# Altium PCB LR_EVM78.PcbDoc
Units mm, origin at the board's own origin, x right, y up, seen from the top; angles counter-clockwise.
Board outline 90 x 62 mm, 2 copper layers (Top Layer, Bottom Layer), stack 1.571 mm thick; 53 components, 69 nets, 276 pads, 341 vias.
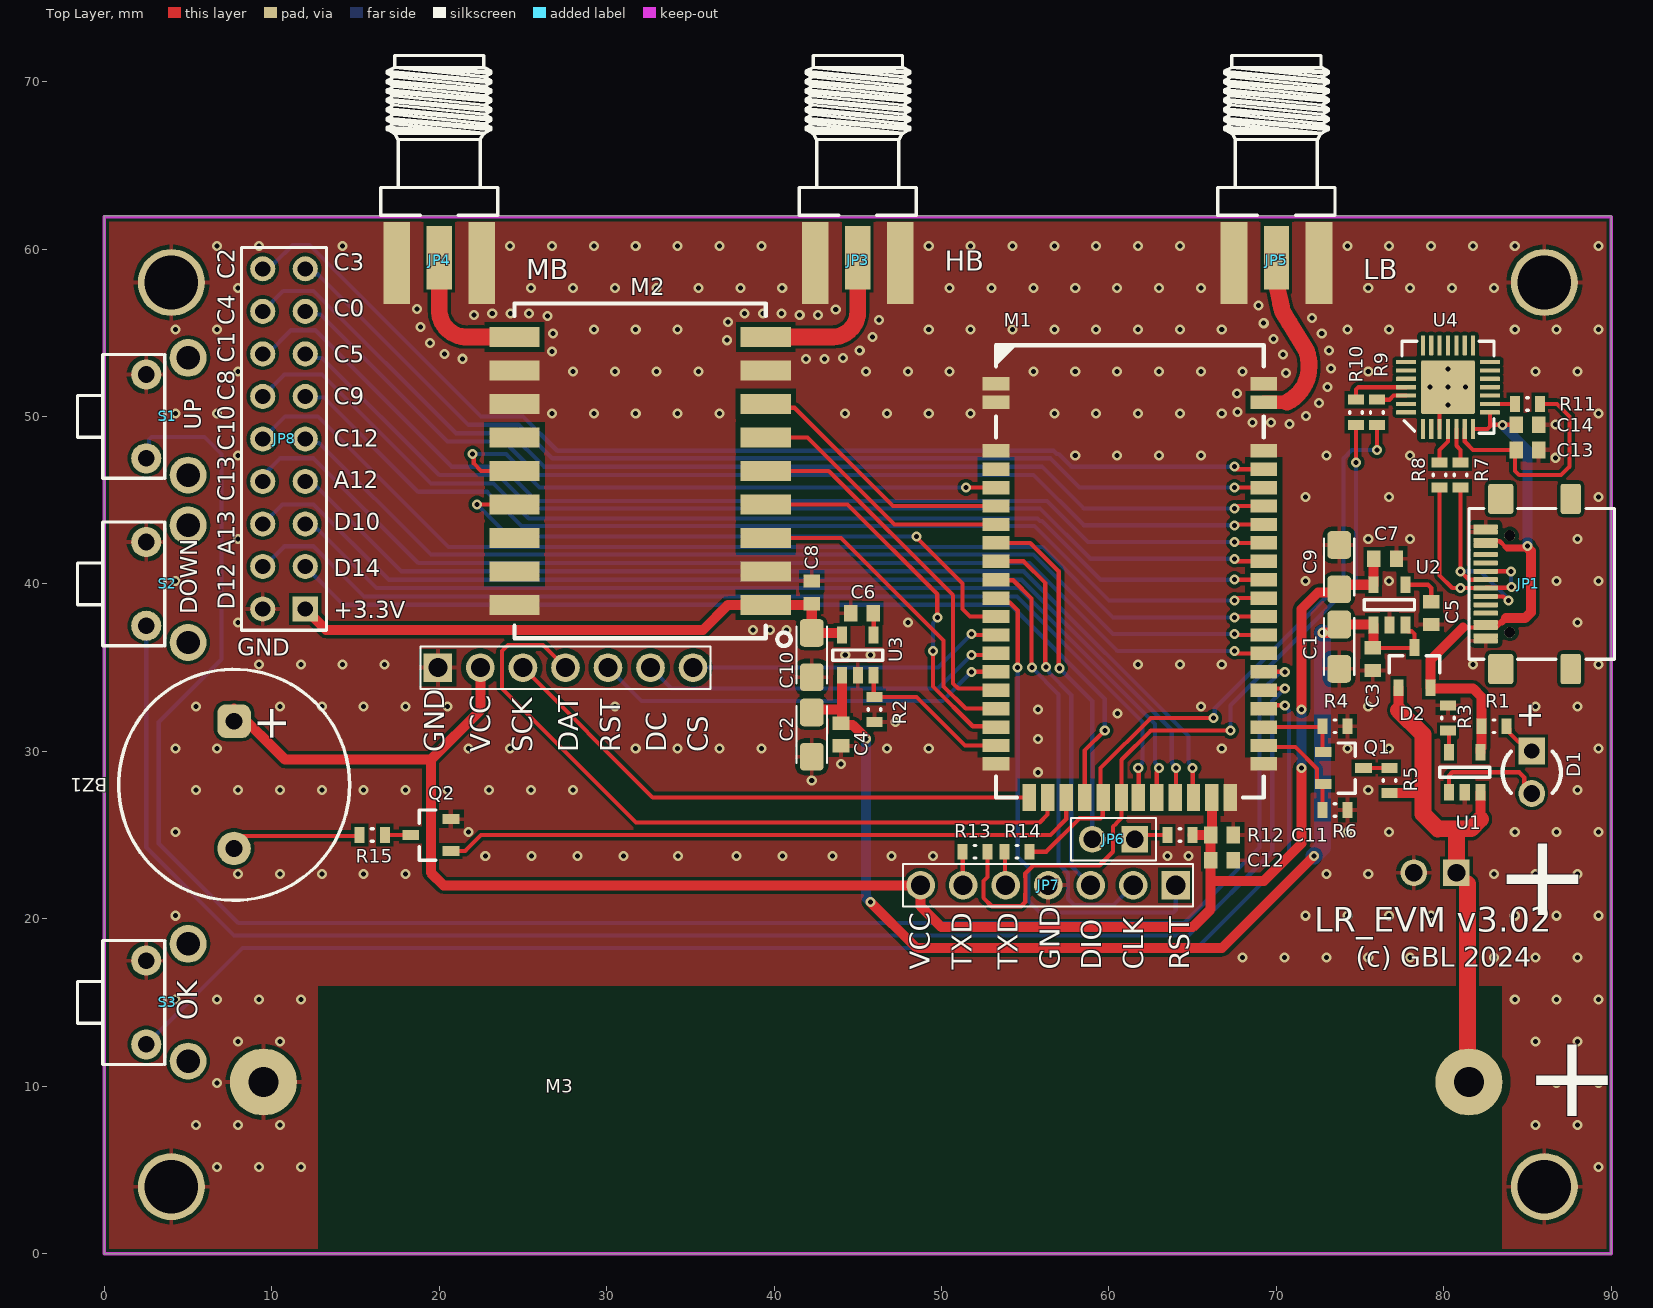
[diagram p0: Top Layer view]
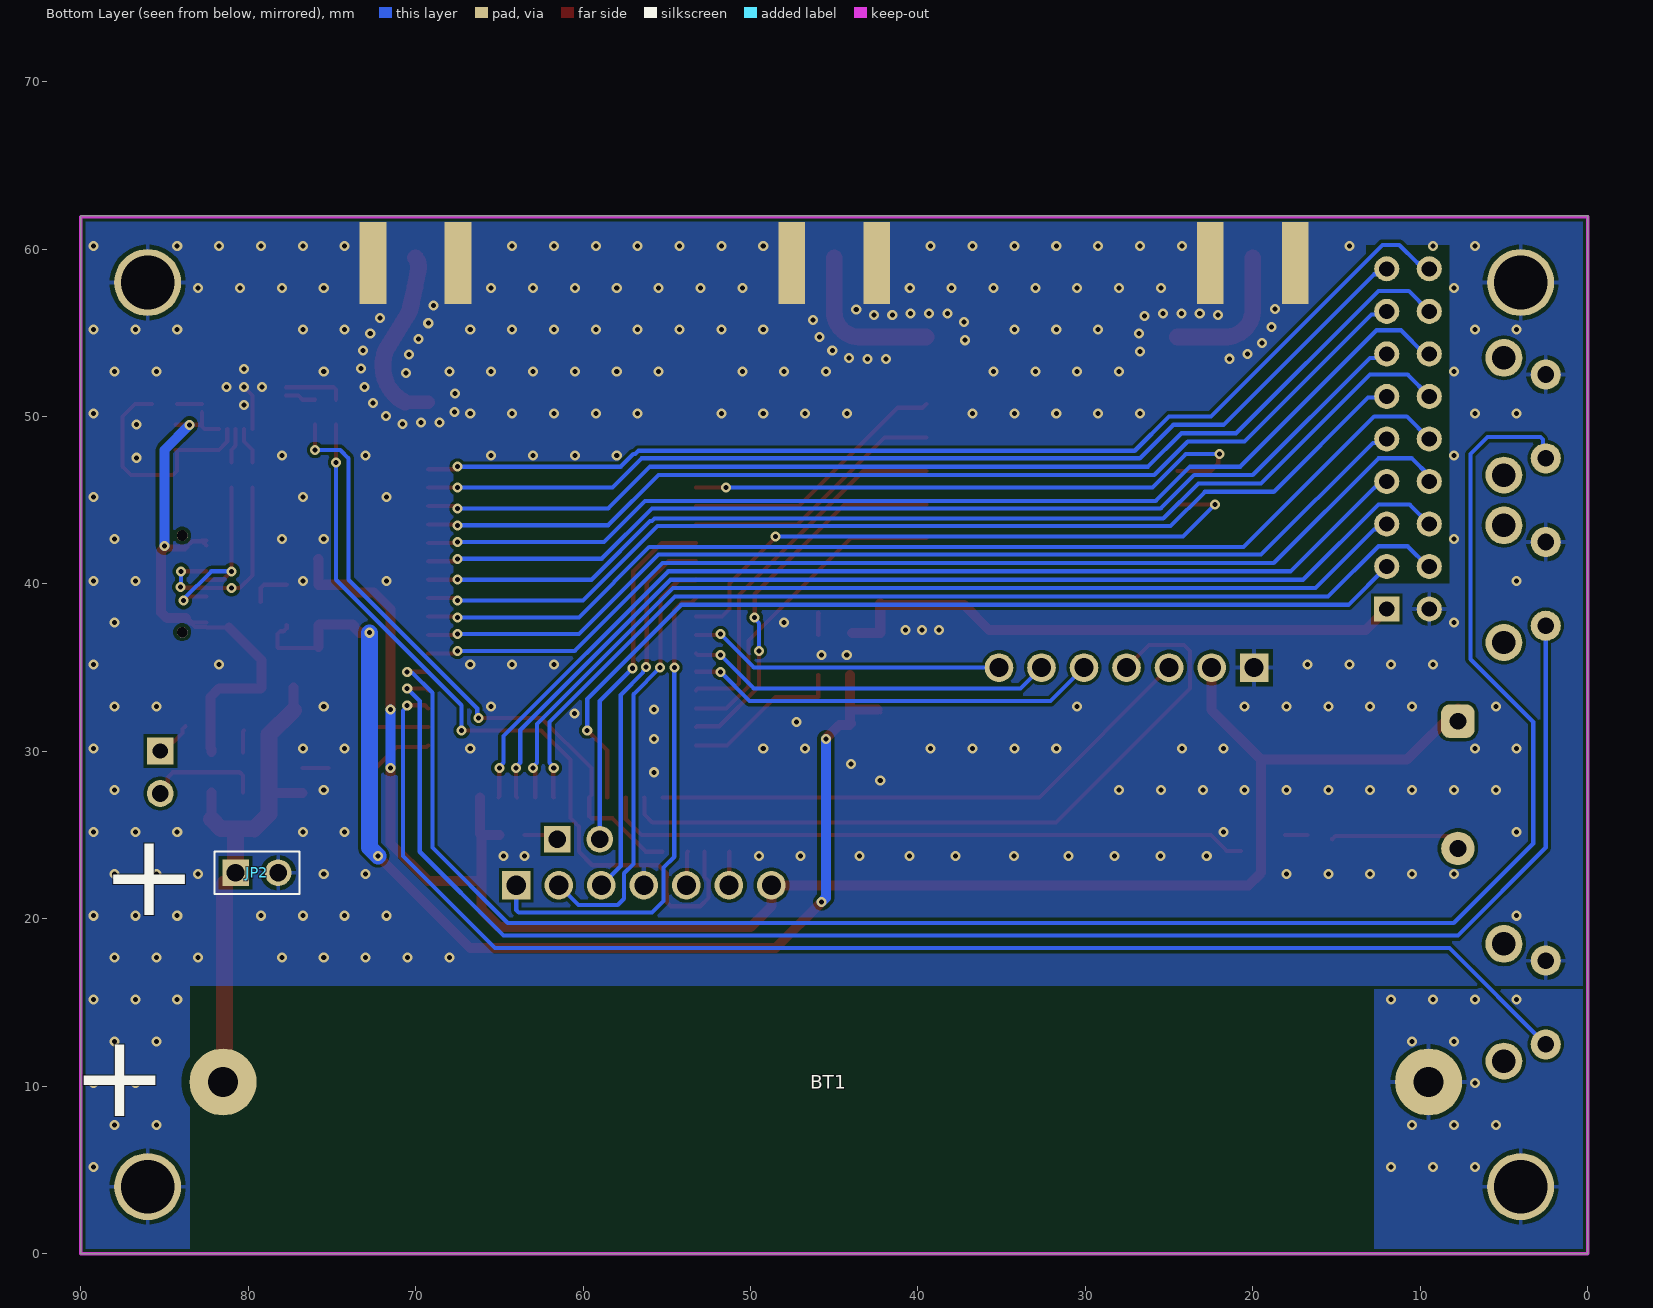
[diagram p1: Bottom Layer view, seen from below]
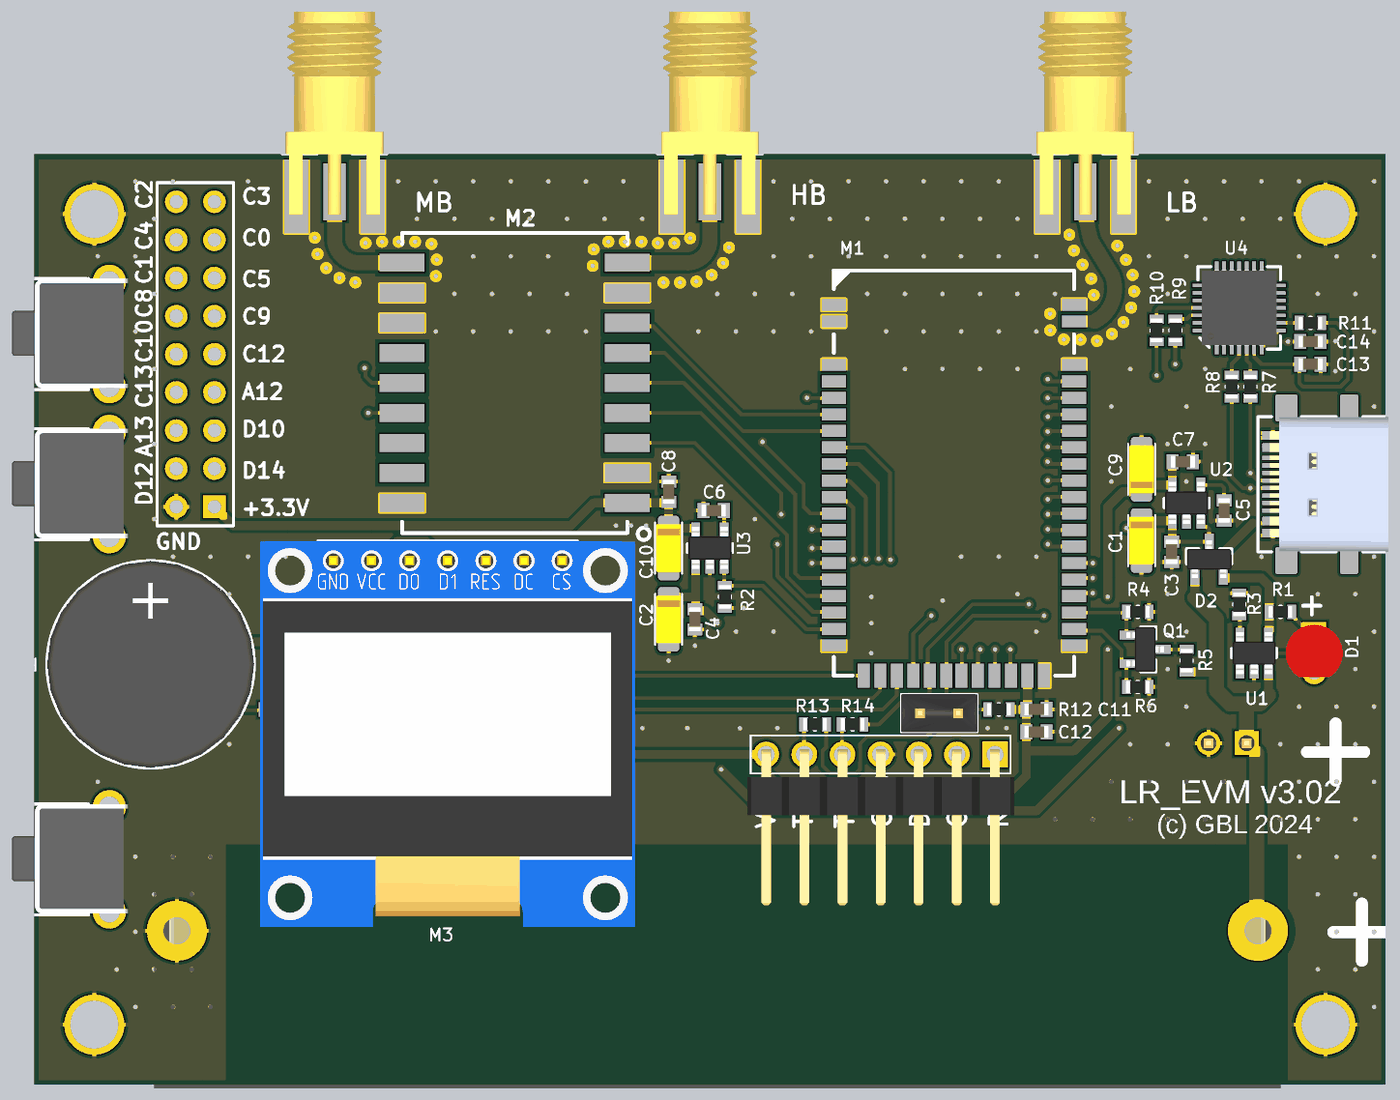
[diagram p2: 3D render of the assembled board from above, using the file's embedded part models]

## Layer stack, top to bottom
Top Solder: solder mask 0.0102, Solder Resist, Dk 3.5
Top Layer: signal copper 0.0356
Dielectric 1: dielectric 1.5, FR-4, Dk 4.8
Bottom Layer: signal copper 0.0356
Bottom Solder: solder mask 0.0102, Solder Resist, Dk 3.5

## Board outline
0,0 0,62 90,62 90,0

## Design rules (kind name [scope] priority, off if disabled: settings)
Clearance Clearance_2 [InNamedPolygon('GND_L01_P005') Or InNamedPolygon('GND_L01_P006') Or InNamedPolygon('GND_L02_P002') Or InNamedPolygon('GND_L02_P003') vs InNet('VBAT')] p1: gap=0.5 ignorepadtopadclearanceinfootprint=FALSE
Clearance Clearance_1 [InNamedPolygon('GND_L01_P001') vs InComponent('M1') or InComponent('M2') or InComponent('M3')] p2: gap=0.3 ignorepadtopadclearanceinfootprint=FALSE
Clearance [All] p3: gap=0.2 ignorepadtopadclearanceinfootprint=FALSE
HoleSize [All] p1: absolutevalues=TRUE maxlimit=5 minlimit=0.025 maxpercent=80.000 minpercent=20.000
MinimumSolderMaskSliver [All] p1: minsoldermaskwidth=0.02
PolygonConnect PolygonConnect_6 [InComponent('JP5') vs IsNamedPolygon('GND_L01_P001') Or IsNamedPolygon('GND_L02_P000')] p1: thpad.connectstyle=Relief thpad.reliefconductorwidth=0.254 thpad.reliefentries=4 thpad.polygonreliefangle="90 Angle" thpad.airgapwidth=0.254 smdpad.connectstyle=Direct smdpad.reliefconductorwidth=0.254 smdpad.reliefentries=4 smdpad.polygonreliefangle="90 Angle" smdpad.airgapwidth=0.254 via.connectstyle=Relief via.reliefconductorwidth=0.254 via.reliefentries=4 via.polygonreliefangle="90 Angle" via.airgapwidth=0.254
PolygonConnect PolygonConnect_5 [All vs IsNamedPolygon('GND_L01_P005') Or IsNamedPolygon('GND_L01_P006') Or IsNamedPolygon('GND_L02_P002') Or IsNamedPolygon('GND_L02_P003')] p2: thpad.connectstyle=Relief thpad.reliefconductorwidth=0.254 thpad.reliefentries=4 thpad.polygonreliefangle="90 Angle" thpad.airgapwidth=0.254 smdpad.connectstyle=Relief smdpad.reliefconductorwidth=0.254 smdpad.reliefentries=4 smdpad.polygonreliefangle="90 Angle" smdpad.airgapwidth=0.254 via.connectstyle=Direct via.reliefconductorwidth=0.254 via.reliefentries=4 via.polygonreliefangle="90 Angle" via.airgapwidth=0.254
PolygonConnect PolygonConnect_4 [InComponent('JP3') or InComponent('JP4') or InComponent('JP7') vs IsNamedPolygon('GND_L02_P000')] p3: thpad.connectstyle=Relief thpad.reliefconductorwidth=0.254 thpad.reliefentries=4 thpad.polygonreliefangle="90 Angle" thpad.airgapwidth=0.254 smdpad.connectstyle=Direct smdpad.reliefconductorwidth=0.254 smdpad.reliefentries=4 smdpad.polygonreliefangle="90 Angle" smdpad.airgapwidth=0.254 via.connectstyle=Relief via.reliefconductorwidth=0.254 via.reliefentries=4 via.polygonreliefangle="90 Angle" via.airgapwidth=0.254
PolygonConnect PolygonConnect_2 [InComponent('JP3') or InComponent('JP4') or InComponent('JP7') or InComponent('M1') or InComponent('M2') or InComponent('M3') vs IsNamedPolygon('GND_L01_P001')] p4: thpad.connectstyle=Relief thpad.reliefconductorwidth=0.254 thpad.reliefentries=4 thpad.polygonreliefangle="90 Angle" thpad.airgapwidth=0.254 smdpad.connectstyle=Direct smdpad.reliefconductorwidth=0.254 smdpad.reliefentries=4 smdpad.polygonreliefangle="90 Angle" smdpad.airgapwidth=0.254 via.connectstyle=Relief via.reliefconductorwidth=0.254 via.reliefentries=4 via.polygonreliefangle="90 Angle" via.airgapwidth=0.254
PolygonConnect PolygonConnect_3 [InComponent('C17')or InComponent('C18') or InComponent('C20') or InComponent('C19') vs IsNamedPolygon('GND_L01_P001')] p5: thpad.connectstyle=Relief thpad.reliefconductorwidth=0.254 thpad.reliefentries=4 thpad.polygonreliefangle="90 Angle" thpad.airgapwidth=0.254 smdpad.connectstyle=Direct smdpad.reliefconductorwidth=0.254 smdpad.reliefentries=4 smdpad.polygonreliefangle="90 Angle" smdpad.airgapwidth=0.254 via.connectstyle=Relief via.reliefconductorwidth=0.254 via.reliefentries=4 via.polygonreliefangle="90 Angle" via.airgapwidth=0.254
PolygonConnect PolygonConnect_1 [All vs IsNamedPolygon('GND_L01_P001') Or IsNamedPolygon('GND_L02_P000')] p6: thpad.connectstyle=Relief thpad.reliefconductorwidth=0.254 thpad.reliefentries=4 thpad.polygonreliefangle="90 Angle" thpad.airgapwidth=0.254 smdpad.connectstyle=Relief smdpad.reliefconductorwidth=0.254 smdpad.reliefentries=4 smdpad.polygonreliefangle="90 Angle" smdpad.airgapwidth=0.254 via.connectstyle=Direct via.reliefconductorwidth=0.254 via.reliefentries=4 via.polygonreliefangle="90 Angle" via.airgapwidth=0.254
PolygonConnect [All] p7: connectstyle=Relief reliefconductorwidth=0.254 reliefentries=4 polygonreliefangle="90 Angle" airgapwidth=0.254
RoutingVias [All] p1: holewidth=0.711 width=1.27 viastyle="Through Hole" minholewidth=0.711 minwidth=1.27 maxholewidth=0.711 maxwidth=1.27
SilkToSilkClearance [All] p1: silktosilkclearance=0.05
SilkToSolderMaskClearance [IsPad] p1: minsilkscreentomaskgap=0.02 clearancetoexposedcopper=TRUE
SolderMaskExpansion [All] p1: expansion=0.102 istentingtop=FALSE
Width [All] p1: maxlimit=3 minlimit=0.15 preferedwidth=0.25
26 further rules are at their usual default settings.

## Components (designator, comment, footprint, x,y, rotation, side; value= is the part's Value field where it differs from the comment)
BT1 "18650" 18650 45.5,10.25 r180 bottom
BZ1 "AZ-14M40" AZ-14M40 7.75,28 r270 top value={Value}
C1 "22u" C_TANTAL_A 73.75,36.25 r270 top
C2 "22u" C_TANTAL_A 42.25,31 r270 top
C3 "100n" C-0603 75.75,35.5 r270 top
C4 "100n" C-0603 44,31 r270 top
C5 "nc" C-0603 79.25,38.25 r270 top
C6 "nc" C-0603 45.25,38.25 r180 top
C7 "100n" C-0603 76.5,41.5 r0 top
C8 "100n" C-0603 42.25,39.5 r90 top
C9 "22u" C_TANTAL_A 73.75,41 r90 top
C10 "22u" C_TANTAL_A 42.25,35.75 r270 top
C11 "1u" C-0603 66.75,25 r0 top
C12 "1n" C-0603 66.75,23.5 r0 top
C13 "100n" C-0603 85,48 r0 top
C14 "100n" C-0603 85,49.5 r180 top
D1 "DLED" LED_3mm_RED 85.25,28.75 r270 top
D2 "BAT54C" SOT-23 78.25,35 r90 top
JP1 "L-KLS1-5473" L-KLS1-5473 82.5,40 r90 top
JP2 "HEADER 2" PLS1-2 80.75,22.75 r180 bottom
JP3 "EM-SA071-GGT" SMA_F_EDGE 45,60.75 r270 top locked
JP4 "EM-SA071-GGT" SMA_F_EDGE 20,60.75 r270 top
JP5 "EM-SA071-GGT" SMA_F_EDGE 70,60.75 r270 top
JP6 "HEADER 2" PLS1-2 61.54,24.75 r180 top
JP7 "Header 7" PLS1-7R 63.99,22 r180 top
JP8 "Header 9X2" HDR2X9 12,38.5 r90 top locked
M1 "E78-400M22S1C" E78_400_M22S1C 61.25,40.25 r0 top locked
M2 "LORA1121" LORA1121 32,46.75 r180 top locked
M3 "OLED0_96" OLED096 19.92,35 r0 top
Q1 "MOSF-N" SOT-23 74,29 r0 top
Q2 "MMUN2211" SOT-23 19.5,25 r180 top
R1 "RES" R-0603 83,31.5 r0 top
R2 "100k" R-0603 46,32.5 r90 top
R3 "2k" R-0603 80.25,32 r270 top
R4 "1M" R-0603 73.5,31.5 r0 top
R5 "100k" R-0603 76.75,28.25 r90 top
R6 "10k" R-0603 73.5,26.5 r0 top
R7 "22" R-0603 81,46.5 r270 top
R8 "22" R-0603 79.75,46.5 r270 top
R9 "1k" R-0603 76,50.25 r90 top
R10 "1k" R-0603 74.75,50.25 r90 top
R11 "10k" R-0603 85,50.75 r180 top
R12 "1k" R-0603 64.25,25 r180 top
R13 "1k" R-0603 52,24 r0 top
R14 "1k" R-0603 54.5,24 r0 top
R15 "RES" R-0603 16,25 r0 top
S1 "KLS7-TS3602 -3 15-180" KLS7-TS3602 2.5,50 r270 top locked
S2 "KLS7-TS3602 -3 15-180" KLS7-TS3602 2.5,40 r270 top locked
S3 "KLS7-TS3602 -3 15-180" KLS7-TS3602 2.5,15 r270 top locked
U1 "MCP73831-2ATI/OT" SOT-23-5 81.25,28.75 r90 top
U2 "NCP551SN33LT1G" SOT-23-5 76.75,38.75 r90 top
U3 "NCP551SN33LT1G" SOT-23-5 45,35.75 r90 top
U4 "CP2102" QFN28 80.25,51.75 r90 top value={Value}

## Footprints (in the part's own frame and the unit in brackets; to place one, negate y for a bottom-side part, rotate by r counter-clockwise, add the part's x,y. Pads: shape width x height; smd on the part's side, far side on the other; paste and mask are expansions set on the pad)
18650 [mm]
  round 4 hole 1.8: 1(-36,0) 2(36,0)
  body extent -37.5,-10.5 37.5,10.5, height 21
AZ-14M40 [mm]
  rrect50% 2x2 hole 1: 1(-3.8,0)
  round 2 hole 1: 2(3.8,0)
  silkscreen extent -6.9,-6.9 6.9,6.9, body extent -6.89,-6.9 6.89,6.9, height 5.8
C-0603 [mm] "Chip Capacitor, 2-Leads, Body 1,60x0,80mm, IPC Medium Density"
  rect 0.8x1 smd: 1(-0.675,0) 2(0.675,0)
  body extent -0.8,-0.4 0.8,0.4, height 0.8
C_TANTAL_A [mm] "Capacitor, Polarized, Molded Body; 3.20 mm L X 1.65 mm W X 1.80 mm H body"
  rrect35% 1.66x1.42 smd: 1(1.325,0) 2(-1.325,0)
  silkscreen extent -1.7,-0.9 1.7,0.9, body extent -1.6,-0.82 1.6,0.82, height 1.8
E78_400_M22S1C [mm]
  rect 1.6x0.8 smd: 1(-8,11.7) 2(-8,10.6) 3(-8,7.7) 4(-8,6.6) 5(-8,5.5) 6(-8,4.4) 7(-8,3.3) 8(-8,2.2) 9(-8,1.1) 10(-8,0) 11(-8,-1.1) 12(-8,-2.2) 13(-8,-3.3) 14(-8,-4.4) 15(-8,-5.5) 16(-8,-6.6) 17(-8,-7.7) 18(-8,-8.8) 19(-8,-9.9) 20(-8,-11) 33(8,-11) 34(8,-9.9) 35(8,-8.8) 36(8,-7.7) 37(8,-6.6) 38(8,-5.5) 39(8,-4.4) 40(8,-3.3) 41(8,-2.2) 42(8,-1.1) 43(8,0) 44(8,1.1) 45(8,2.2) 46(8,3.3) 47(8,4.4) 48(8,5.5) 49(8,6.6) 50(8,7.7) 51(8,10.6) 52(8,11.7)
  rect 0.8x1.6 smd: 21(-6,-13) 22(-4.9,-13) 23(-3.8,-13) 24(-2.7,-13) 25(-1.6,-13) 26(-0.5,-13) 27(0.5,-13) 28(1.6,-13) 29(2.7,-13) 30(3.8,-13) 31(4.9,-13) 32(6,-13)
  silkscreen extent -8,-13 8,14, body extent -8,-13 8,13, height 2.8
HDR2X9 [mm] "Connector; Header; 9x2 Position"
  rect 1.5x1.5 hole 0.9: 1(0,0)
  round 1.5 hole 0.9: 2(0,2.54) 3(2.54,0) 4(2.54,2.54) 5(5.08,0) 6(5.08,2.54) 7(7.62,0) 8(7.62,2.54) 9(10.16,0) 10(10.16,2.54) 11(12.7,0) 12(12.7,2.54) 13(15.24,0) 14(15.24,2.54) 15(17.78,0) 16(17.78,2.54) 17(20.32,0) 18(20.32,2.54)
  silkscreen extent -1.27,-1.27 21.59,3.81
KLS7-TS3602 [mm] "miniature switch"
  round 1.8 hole 1: 1(-2.5,0) 2(2.5,0)
  oval 2.25x2.2 hole 1.4: 3(-3.5,2.5)
  round 2.2 hole 1.4: 3(3.5,2.5)
  silkscreen extent -3.7,-4.1 3.7,1.1, body extent -3.7,-3.97 3.6,3.75, height 4.4
L-KLS1-5473 [mm] "USB 3.1 Type C"
  rrect20% 1.8x1.2 smd mask+0.07: 1(-5.08,-5.08) 1(5.08,-5.08)
  rrect20% 1.8x1.5 smd mask+0.07: 1(-5.08,-0.9) 1(5.08,-0.9)
  rrect30% 0.3x1.45 smd paste-2 mask+0.07: A1(-3.1,0) A4(-2.6,0) A9(2.6,0) A12(3.4,0) B1(3.1,0) B4(2.3,0) B9(-2.3,0) B12(-3.4,0)
  rrect30% 0.3x1.45 smd mask+0.07: A5(-1.25,0) A6(-0.25,0) A7(0.25,0) A8(1.25,0) B5(1.75,0) B6(0.75,0) B7(-0.75,0) B8(-1.75,0)
  round 0.65 hole 0.65 unplated paste-2539.97 mask+0.07: MH(-2.885,-1.44) MH(2.885,-1.44)
  silkscreen extent -4.5,-7.69 4.5,1, body extent -4.47,-7.7 4.47,0.2, height 3.2
LED_3mm_RED [mm]
  rect 1.6x1.6 hole 0.9: 1(-1.27,0)
  round 1.6 hole 1: 2(1.27,0)
  silkscreen extent -1.24,-1.75 1.24,1.75, body extent -1.9,-1.9 1.6,1.9, height 5.75
LORA1121 [mm]
  rect 3x1.2 smd: 1(-7.5,8) 2(-7.5,6) 3(-7.5,4) 4(-7.5,2) 5(-7.5,0) 6(-7.5,-2) 7(-7.5,-4) 8(-7.5,-6) 9(-7.5,-8) 10(7.5,-8) 11(7.5,-6) 12(7.5,-4) 13(7.5,-2) 14(7.5,0) 15(7.5,2) 16(7.5,4) 17(7.5,6) 18(7.5,8)
  silkscreen extent -8.99,-10 7.5,10.46, body extent -7.5,-10 7.5,10, height 2
OLED096 [mm] "Header, Vertical, 2.54 mm pitch; 0.70 mm lead width, 7 pins, 1 row, 7 pins per row, 16.51 mm L X 2.54 mm W X 7.54 mm H body"
  rect 1.71x1.71 hole 1.14 paste-2539.97: 1(0,0)
  round 1.71 hole 1.14 paste-2539.97: 2(2.54,0) 3(5.08,0) 4(7.62,0) 5(10.16,0) 6(12.7,0) 7(15.24,0)
  silkscreen extent -1.04,-1.27 16.28,1.27, body extent -4.88,-24.5 20.12,1.2, height 6.54
PLS1-2 [mm] "Header, Vertical, 2.54 mm pitch; 0.64 mm lead width, 2 pins, 1 row, 2 pins per row, 5.08 mm L X 2.54 mm W X 8.54 mm H body"
  rect 1.59x1.59 hole 1.06 paste-2539.97: 1(0,0)
  round 1.59 hole 1.06 paste-2539.97: 2(2.54,0)
  silkscreen extent -1.27,-1.27 3.81,1.27, body extent -1.27,-1.27 3.81,1.27, height 8.54
PLS1-7R [mm] "Header, Vertical, 2.54 mm pitch; 0.70 mm lead width, 7 pins, 1 row, 7 pins per row, 16.51 mm L X 2.54 mm W X 7.54 mm H body"
  rect 1.71x1.71 hole 1.14 paste-2539.97: 1(0,0)
  round 1.71 hole 1.14 paste-2539.97: 2(2.54,0) 3(5.08,0) 4(7.62,0) 5(10.16,0) 6(12.7,0) 7(15.24,0)
  silkscreen extent -1.04,-1.27 16.28,1.27, body extent -1.27,-0.32 16.51,10.04, height 2.54
QFN28 [mm]
  rrect20% 1.2x0.25 smd: 1(-2.5,1.5) 2(-2.5,1) 3(-2.5,0.5) 4(-2.5,0) 5(-2.5,-0.5) 6(-2.5,-1) 7(-2.5,-1.5) 15(2.5,-1.5) 16(2.5,-1) 17(2.5,-0.5) 18(2.5,0) 19(2.5,0.5) 20(2.5,1) 21(2.5,1.5)
  rrect20% 0.25x1.2 smd: 8(-1.5,-2.5) 9(-1,-2.5) 10(-0.5,-2.5) 11(0,-2.5) 12(0.5,-2.5) 13(1,-2.5) 14(1.5,-2.5) 22(1.5,2.5) 23(1,2.5) 24(0.5,2.5) 25(0,2.5) 26(-0.5,2.5) 27(-1,2.5) 28(-1.5,2.5)
  rrect5% 3.2x3.2 smd paste-4: 29(0,0)
  silkscreen extent -2.75,-2.75 2.75,2.75, body extent -2.5,-2.5 2.5,2.5, height 1
R-0603 [mm] "Chip Resistor, 2-Leads, Body 1,60x0,82mm, IPC Medium Density"
  rect 0.6x0.95 smd: 1(-0.75,0) 2(0.75,0)
  silkscreen extent -0.05,-0.38 0.05,0.38, body extent -0.8,-0.4 0.8,0.4, height 0.45
SMA_F_EDGE [mm] "SMA End Launch Jack for 1.58mm PCB, 50 Ohm, Flat Tab Contact"
  rect 3.81x1.5 smd: 1(1.27,0)
  rect 4.9x1.6 smd: 2(1.575,2.54) 2(1.575,-2.54)
  rect 4.9x1.6 smd far side: 2(1.575,2.54) 2(1.575,-2.54)
  silkscreen extent -10.81,-3.5 -1.28,3.5, body extent -10.73,-3.25 2.77,3.25, height 3.7
SOT-23 [mm]
  rect 1x0.6 smd: 1(-1.2,0.95) 2(-1.2,-0.95) 3(1.2,0)
  silkscreen extent -0.3,-1.5 0.7,1.5, body extent -1.25,-1.5 1.25,1.5, height 1.2
SOT-23-5 [mm] "SOT23, 5-Leads, Body 2,90x2,45mm, Pitch 0,95mm, IPC Medium Density"
  rect 1x0.6 smd: 1(-1.2,0.95) 2(-1.2,0) 3(-1.2,-0.95) 4(1.2,-0.95) 5(1.2,0.95)
  silkscreen extent -0.3,-1.5 0.3,1.5, body extent -1.4,-1.45 1.4,1.45, height 1.55

## Part data
BT1: library part Battery, "Multicell Battery", LatestRevisionDate=17-Jul-2002, LatestRevisionNote="Re-released for DXP Platform.", PackageDescription="Battery; 2 Leads", PackageReference=BAT-2, Published=24-Mar-1999, Publisher="Altium Limited"
BZ1: library part BUZ-AZ-14M40, Mounting  Method=THT
C1 C2 C9 C10: library part CAPP, Voltage=16V, Вид=Конденсатор
C3 C4 C5 C6 C7 C8 C11 C12 C13 C14: library part CAPN, Voltage=50V, Вид=Конденсатор, Точність/група=NP0
JP3 JP4 JP5: library part SMA, "SMA Female R/A PCB Mount", Вид=Роз'єм
JP7: "Header, 7-Pin", LatestRevisionDate=17-Jul-2002, LatestRevisionNote="Re-released for DXP Platform.", Publisher="Altium Limited"
JP8: "Header, 9-Pin, Dual row", LatestRevisionDate=17-Jul-2002, LatestRevisionNote="Re-released for DXP Platform.", Publisher="Altium Limited"
R2 R3 R4 R5 R6 R7 R8 R9 R10 R11 R12 R13 R14: library part RES, Вид=Резистор, Точність/група=5%
S1 S2 S3: library part SW-1, Вид=Кнопка
U1: library part MCP73831
U2 U3: library part LP2980, "50mA Low-Dropout Regulator", Вид=Мікросхема
D1: Вид=Світлодіод
D2: Вид=Діод
JP1 U4: Mounting  Method=SMD
JP2 JP6: Вид=Роз'єм
Q1 Q2: Вид=Транзистор
R1 R15: Вид=Резистор, Точність/група=5%

## Free pads (board coordinates)
  round 4 hole 3.2: 0(4,4) 0(4,58) 0(86,4) 0(86,58)

## Via types
v1: diameter 0.6, hole 0.3, Top Layer to Bottom Layer, tented both sides, 293 vias
v2: diameter 0.6, hole 0.3, Top Layer to Bottom Layer, 48 vias

## Nets (pads, with @x,y where several pads share a name; then routed paths per layer and width w, separated by ;. In a path a pad name is that pad's centre, name@x,y a point inside that pad or via, vN(x,y) a via of type N, cw(c..) or ccw(c..) an arc to the next point about the centre after c; other vN are vias at no path point)
\: M1.36 S3.2 | length 83.3
  Top Layer w0.25: M1.36 69.45,32.75 v1(70.5,32.75)
  Bottom Layer w0.25: S3.2 8.25,18.25 65.25,18.25 70.75,23.75 70.75,32.429 70.5,32.679 v1(70.5,32.75)
BATT_LEVEL: M1.34 Q1.2 R6.1 | length 6.5
  Top Layer w0.25: M1.34 69.35,30.25 71.134,30.25 72.425,28.959 72.425,28.225 72.6,28.05 Q1.2 72.75,28 R6.1
BATT_MEAS: M1.35 Q1.1 R4.1 | length 5.1
  Top Layer w0.25: M1.35 72.7,31.45 R4.1 72.75,30 Q1.1
BOOT: JP6.2 M1.8 | length 21.3
  Top Layer w0.25: M1.8 55.3,42.45 57,40.75 57,35 v1(57.038,34.962)
  Bottom Layer w0.25: v1(57.038,34.962) 59,33 JP6.2
BUSY1121: M1.6 M2.7 | length 16.3
  Top Layer w0.25: M2.7 39.729,50.521 41.229,50.521 47.1,44.65 M1.6
BUZZ: M1.23 Q2.1 | length 38.8
  Top Layer w0.25: Q2.1 21.55,24.05 22.5,25 56.5,25 57.45,25.95 M1.23
DM: JP1.A7 JP1.B7 R7.2 | length 11.8
  Top Layer w0.25: R7.2 v1(81,40.75) 81.5,40.25 JP1.A7 ; JP1.B7 83.551,39.25 83.805,38.997 v1(83.86,38.997)
  Bottom Layer w0.25: v1(81,40.75) 82.2,40.75 83.86,39.09 v1(83.86,38.997)
DOWN: M1.37 S2.2 | length 96.1
  Top Layer w0.25: M1.37 69.35,33.75 v1(70.5,33.75)
  Bottom Layer w0.25: S2.2 2.5,24.25 7.75,19 64.75,19 69.75,24 69.75,33 v1(70.5,33.75)
DP: JP1.A6 JP1.B6 R8.2 | length 12.3
  Top Layer w0.25: R8.2 79.75,40.5 80.5,39.75 v1(81,39.75) JP1.A6 82.523,39.773 83.993,39.773 v1(84.03,39.811) ; JP1.B6 v1(84,40.75)
  Bottom Layer w0.25: v1(84,40.75) 84.015,40.735 84.015,39.826 v1(84.03,39.811)
EXTRF: M1.19 R2.2 U3.3 | length 9.8
  Top Layer w0.25: R2.2@45.95,33.25 U3.3 ; R2.2 48.5,33.25 51.4,30.35 M1.19
GND: BT1.2 C1.1 C2.1 C3.2 C4.2 C5.2 C6.2 C7.2 C8.2 C9.1 C10.1 C11.2 C12.2 C13.2 C14.1 JP1.A1 JP1.A12 JP1.B1 JP1.B12 JP2.2 JP3.2 JP4.2 JP5.2 JP7.4 JP8.2 M1.1 M1.2 M1.3 M1.20 M1.32 M1.33 M1.50 M1.52 M2.2 M2.8 M2.11 M2.12 M2.18 M3.1 pad.0 Q2.2 R2.1 R3.1 R4.2 R6.2 S1.1 S2.1 S3.1 U1.2 U2.2 U3.2 U4.3 U4.29 | length 2.7
  Top Layer w0.25: U4.3 79.75,51.25 v2(80.25,51.75)
  other v1: 6.737,5.181 9.237,5.181 11.737,5.181 89.237,5.181 5.487,7.681 7.987,7.681 10.487,7.681 85.487,7.681 87.987,7.681 6.737,10.181 86.737,10.181 89.237,10.181 7.987,12.681 10.487,12.681 85.487,12.681 87.987,12.681 4.237,15.181 6.737,15.181 9.237,15.181 11.737,15.181 84.237,15.181 86.737,15.181 89.237,15.181 67.987,17.681 70.487,17.681 72.987,17.681 75.487,17.681 77.987,17.681 82.987,17.681 85.487,17.681 87.987,17.681 4.237,20.181 71.737,20.181 74.237,20.181 76.737,20.181 79.237,20.181 84.237,20.181 86.737,20.181 89.237,20.181 7.987,22.681 10.487,22.681 12.987,22.681 15.487,22.681 17.987,22.681 72.987,22.681 75.487,22.681 82.987,22.681 85.487,22.681 87.987,22.681 22.75,23.75 25.5,23.75 28.25,23.75 31,23.75 34.25,23.75 37.75,23.75 40.5,23.75 43.5,23.75 47,23.75 49.5,23.75 63.5,23.75 64.75,23.75 4.237,25.181 21.737,25.181 74.237,25.181 76.737,25.181 84.237,25.181 86.737,25.181 89.237,25.181 5.487,27.681 7.987,27.681 10.487,27.681 12.987,27.681 15.487,27.681 17.987,27.681 20.487,27.681 22.987,27.681 25.487,27.681 27.987,27.681 75.487,27.681 87.987,27.681 42.25,28.25 55.75,28.75 44,29.25 4.237,30.181 6.737,30.181 21.737,30.181 24.237,30.181 31.737,30.181 34.237,30.181 36.737,30.181 39.237,30.181 46.737,30.181 49.237,30.181 66.737,30.181 74.237,30.181 76.737,30.181 89.237,30.181 55.75,30.75 47.25,31.75 60.5,32.25 55.75,32.5 5.487,32.681 10.487,32.681 12.987,32.681 15.487,32.681 17.987,32.681 20.487,32.681 30.487,32.681 65.487,32.681 75.487,32.681 85.487,32.681 87.987,32.681 9.237,35.181 11.737,35.181 14.237,35.181 16.737,35.181 61.737,35.181 64.237,35.181 66.737,35.181 81.737,35.181 89.237,35.181 44.25,35.75 45.75,35.75 38.75,37.25 39.75,37.25 40.75,37.25 7.987,37.681 47.987,37.681 87.987,37.681 4.237,40.181 71.737,40.181 76.737,40.181 86.737,40.181 89.237,40.181 7.987,42.681 75.487,42.681 77.987,42.681 87.987,42.681 71.737,45.181 76.737,45.181 89.237,45.181 86.657,47.533 7.987,47.681 57.987,47.681 60.487,47.681 62.987,47.681 65.487,47.681 72.987,47.681 77.987,47.681 86.657,49.533 4.237,50.181 6.737,50.181 26.737,50.181 29.237,50.181 31.737,50.181 34.237,50.181 36.737,50.181 44.237,50.181 46.737,50.181 49.237,50.181 51.737,50.181 56.737,50.181 59.237,50.181 61.737,50.181 64.237,50.181 66.737,50.181 89.237,50.181 7.987,52.681 27.987,52.681 30.487,52.681 32.987,52.681 35.487,52.681 45.487,52.681 47.987,52.681 50.487,52.681 55.487,52.681 57.987,52.681 60.487,52.681 62.987,52.681 65.487,52.681 67.987,52.681 75.487,52.681 85.487,52.681 87.987,52.681 4.237,55.181 6.737,55.181 29.237,55.181 31.737,55.181 34.237,55.181 49.237,55.181 51.737,55.181 54.237,55.181 56.737,55.181 59.237,55.181 61.737,55.181 64.237,55.181 66.737,55.181 74.237,55.181 76.737,55.181 84.237,55.181 86.737,55.181 89.237,55.181 7.987,57.681 25.487,57.681 27.987,57.681 30.487,57.681 32.987,57.681 35.487,57.681 37.987,57.681 40.487,57.681 50.487,57.681 52.987,57.681 55.487,57.681 57.987,57.681 60.487,57.681 62.987,57.681 65.487,57.681 75.487,57.681 77.987,57.681 80.487,57.681 82.987,57.681 6.737,60.181 9.237,60.181 14.237,60.181 24.237,60.181 26.737,60.181 29.237,60.181 31.737,60.181 34.237,60.181 36.737,60.181 39.237,60.181 49.237,60.181 51.737,60.181 54.237,60.181 56.737,60.181 59.237,60.181 61.737,60.181 64.237,60.181 74.237,60.181 76.737,60.181 79.237,60.181 81.737,60.181 84.237,60.181 89.237,60.181
  other v2: 70.776,49.548 68.58,49.643 69.68,49.635 71.772,50.015 67.668,50.259 80.25,50.675 72.547,50.796 67.657,51.359 79.175,51.75 81.3,51.75 73.06,51.769 70.565,52.606 80.25,52.825 73.258,52.851 41.911,53.433 43.011,53.433 21.385,53.446 44.109,53.504 70.393,53.692 20.325,53.74 26.749,53.867 45.115,53.947 73.152,53.946 19.446,54.401 37.193,54.553 69.817,54.629 45.875,54.743 26.807,54.965 72.71,54.953 18.871,55.339 69.244,55.568 37.259,55.651 46.272,55.769 72.133,55.89 26.457,56.008 22.071,56.067 41.532,56.067 42.632,56.067 23.167,56.157 24.267,56.157 25.367,56.157 38.236,56.157 39.336,56.157 40.436,56.157 43.683,56.39 18.683,56.423 68.939,56.625
INT1121: M1.12 M2.15 | length 36.9
  Top Layer w0.25: v1(22.25,44.75) M2.15 ; v1(48.5,42.825) 48.5,42.775 51.25,40.025 51.25,38.5 51.7,38.05 M1.12
  Bottom Layer w0.25: v1(22.25,44.75) 24.175,42.825 v1(48.5,42.825)
MISO: M1.17 M2.3 | length 19.6
  Top Layer w0.25: M2.3 44,42.75 50.125,36.625 50.125,33.875 51.45,32.55 M1.17
MOSI: M1.18 M2.4 | length 22.8
  Top Layer w0.25: M2.4 44.384,44.75 49.75,39.384 v1(49.75,38) ; v1(49.5,36) 49.5,33.864 51.864,31.5 53.2,31.5 M1.18
  Bottom Layer w0.25: v1(49.5,36) 49.5,37.655 49.75,37.905 v1(49.75,38)
NetBZ1_2: BZ1.2 R15.1 | length 8
  Top Layer w0.25: BZ1.2@8,24.7 7.75,24.95 15.075,24.95 15.25,24.775 R15.1@15.25,24.75
NetC5_1: C5.1 U2.4 | length 2.5
  Top Layer w0.25: U2.4 79.05,39.95 79.25,39.75 C5.1
NetC6_1: C6.1 U3.4 | length 1.3
  Top Layer w0.25: U3.4 45.95,38.225 C6.1 C6.1@45.95,38.275
NetC13_1: C13.1 R11.1 U4.6 | length 13.9
  Top Layer w0.25: U4.6 81.252,49.248 81.252,48.498 81.75,48 C13.1 84.25,47.925 84.25,46.75 84.5,46.5 87,46.5 87.5,47 87.5,50 86.75,50.75 R11.1
NetD1_1: D1.1 R1.2 | length 2.2
  Top Layer w0.25: R1.2 83.925,31.325 83.925,31.095 84.471,30.549 84.825,30.549 85,30.374 D1.1@85,30.02
NetD1_2: D1.2 U1.1 | length 6.8
  Top Layer w0.25: U1.1 80.3,28.55 80.5,28.75 84.5,28.75 84.804,28.446 84.804,27.676 D1.2@85,27.48
NetJP3_1: JP3.1 M2.9 | length 9.6
  Top Layer w1: M2.9 43.508,54.75 ; 43.5,54.75 ccw(c43.5,56.25) 43.508,54.75 ; 43.52,54.738 43.508,54.75 ; JP3.1 45,56.25 cw(c43.5,56.25) 43.508,54.75
NetJP4_1: JP4.1 M2.10 | length 8.8
  Top Layer w1: JP4.1 20,56.25 ccw(c21.625,56.375) 21.75,54.75 ; 21.5,54.75 M2.10
NetJP5_1: JP5.1 M1.51 | length 11
  Top Layer w0.254: 71.75,54 cw(c71.567,53.824) 71.807,53.905
  Top Layer w0.8: M1.51 70.635,50.85
  Top Layer w1: JP5.1 69.992,59.468 69.99,59.465 ccw(c70.825,58.915) 69.842,58.732 ccw(c130.168,70.119) 70.251,56.748 70.253,56.737 ccw(c83.328,59.668) 70.376,56.235 70.781,55.575 71.75,54 ; 70.635,50.85 ccw(c69.571,52.977) 71.938,52.74 ccw(c69.155,53.019) 71.807,53.905
NetJP6_1: JP6.1 R12.2 | length 2.1
  Top Layer w0.25: JP6.1 61.79,25 R12.2
NetJP7_5: JP7.5 R14.1 | length 2
  Top Layer w0.25: R14.1 53.79,23.96 53.79,22.04 JP7.5
NetJP7_6: JP7.6 R13.1 | length 2
  Top Layer w0.25: R13.1 51.27,23.98 51.27,22.02 JP7.6
NetQ1_3: Q1.3 R5.2 | length 1.6
  Top Layer w0.25: Q1.3 R5.2
NetQ2_3: Q2.3 R15.2 | length 1.3
  Top Layer w0.25: R15.2 Q2.3@18.079,25
NetR3_2: R3.2 U1.5 | length 1.3
  Top Layer w0.25: R3.2 80.3,31.2 U1.5
NetR7_1: R7.1 U4.5 | length 2.1
  Top Layer w0.25: U4.5 80.75,48.25 81,48 R7.1
NetR8_1: R8.1 U4.4 | length 2.2
  Top Layer w0.25: R8.1 79.75,48 80.248,48.498 80.248,49.248 U4.4
NetR9_2: R9.2 U4.26 | length 1.9
  Top Layer w0.25: R9.2 76.75,51 77,51.25 U4.26
NetR10_2: R10.2 U4.25 | length 3.7
  Top Layer w0.25: R10.2 74.75,51.601 74.899,51.75 U4.25
NetR11_2: R11.2 U4.9 | length 1.5
  Top Layer w0.25: U4.9 R11.2
NRST: JP7.1 M1.11 | length 29.9
  Top Layer w0.25: M1.11 53.523,38.877 54.085,38.877 54.55,38.412 v1(54.55,35)
  Bottom Layer w0.25: v1(54.55,35) 54.55,23.7 55.19,23.06 55.19,21.06 55.88,20.37 63.844,20.37 63.99,20.516 JP7.1
NSS1121: M1.7 M2.6 | length 15.9
  Top Layer w0.25: M2.6 42,48.75 47.2,43.55 M1.7
OLED_CS: M1.13 M3.7 | length 18.9
  Top Layer w0.25: v1@51.8,36.95 M1.13
  Bottom Layer w0.25: M3.7 49.8,35 v1(51.8,37)
OLED_DATA: M1.22 M3.4 | length 43.9
  Top Layer w0.25: M3.4 26.19,36.35 24.1,36.35 23.75,36 23.75,33.75 31.75,25.75 55.864,25.75 56.335,26.221 56.335,27.235 M1.22
OLED_DC: M1.14 M3.6 | length 22.1
  Top Layer w0.25: v1@51.75,35.75 53.15,35.75 M1.14
  Bottom Layer w0.25: M3.6 33.87,33.75 49.8,33.75 v1(51.8,35.75)
OLED_RST: M1.15 M3.5 | length 24.8
  Top Layer w0.25: v1@51.75,34.75 M1.15
  Bottom Layer w0.25: M3.5 32.08,33 50.05,33 v1(51.8,34.75)
OLED_SCK: M1.21 M3.3 | length 33.5
  Top Layer w0.25: M3.3 32.75,27.25 M1.21
PA12: JP8.7 M1.30 | length 62.8
  Top Layer w0.25: v1(65,29) 65,27.3 M1.30
  Bottom Layer w0.25: JP8.7 12.338,46.12 12.694,45.765 12.735,45.765 17.75,40.75 54.909,40.75 64.75,30.909 64.75,29.321 65,29.071 v1(65,29)
PA13: JP8.6 M1.29 | length 64.5
  Top Layer w0.25: M1.29 64,27.3 v1(64,29)
  Bottom Layer w0.25: JP8.6 10.63,44.75 12.5,44.75 17,40.25 54.773,40.25 63.75,31.273 63.75,29.321 64,29.071 v1(64,29)
PC0: JP8.15 M1.46 | length 62.6
  Top Layer w0.25: v1(67.5,43.5) 67.55,43.55 M1.46
  Bottom Layer w0.25: JP8.15 12.185,56.095 12.905,56.095 20.5,48.5 23.886,48.5 25.886,46.5 55.5,46.5 58.5,43.5 v1(67.5,43.5)
PC1: JP8.14 M1.45 | length 65.6
  Top Layer w0.25: v1(67.5,42.5) 67.55,42.45 M1.45
  Bottom Layer w0.25: JP8.14 9.74,53.74 11.146,55.146 12.604,55.146 20.75,47 23.75,47 25.8,44.95 56.3,44.95 58.75,42.5 v1(67.5,42.5)
PC2: JP8.18 M1.49 | length 65.9
  Top Layer w0.25: v1(67.5,47) 67.65,46.85 M1.49
  Bottom Layer w0.25: JP8.18 9.798,58.82 10.164,59.185 10.185,59.185 11.25,60.25 12.25,60.25 22.5,50 25,50 27.05,47.95 56.686,47.95 56.886,47.75 57,47.75 57.75,47 v1(67.5,47)
PC3: JP8.17 M1.48 | length 62.7
  Top Layer w0.25: v1(67.5,45.75) M1.48
  Bottom Layer w0.25: JP8.17 12.338,58.82 12.669,58.49 12.76,58.49 21.75,49.5 24.75,49.5 26.75,47.5 56.5,47.5 58.25,45.75 v1(67.5,45.75)
PC4: JP8.16 M1.47 | length 65.7
  Top Layer w0.25: v1(67.5,44.5) 67.65,44.65 M1.47
  Bottom Layer w0.25: JP8.16 10.68,57.5 12.5,57.5 21,49 24.25,49 26.25,47 56,47 58.5,44.5 v1(67.5,44.5)
PC5: JP8.13 M1.44 | length 62.4
  Top Layer w0.25: v1(67.5,41.5) 67.65,41.35 M1.44
  Bottom Layer w0.25: JP8.13 12.239,53.501 12.771,53.501 ; 12.771,53.5 13,53.5 20,46.5 23.5,46.5 25.5,44.5 55.886,44.5 58.886,41.5 v1(67.5,41.5)
PC8: JP8.12 M1.43 | length 65.4
  Top Layer w0.25: v1(67.5,40.25) M1.43
  Bottom Layer w0.25: JP8.12 9.46,51.21 10.75,52.5 13,52.5 19.5,46 23.25,46 25.35,43.9 55.736,43.9 55.886,43.75 56,43.75 59.5,40.25 v1(67.5,40.25)
PC9: JP8.11 M1.42 | length 62.4
  Top Layer w0.25: v1(67.5,39) 67.65,39.15 M1.42
  Bottom Layer w0.25: JP8.11 12.075,51.125 13.125,51.125 18.75,45.5 22.864,45.5 24.914,43.45 55.55,43.45 60,39 v1(67.5,39)
PC10: JP8.10 M1.41 | length 65.3
  Top Layer w0.25: v1(67.5,38) 67.55,38.05 M1.41
  Bottom Layer w0.25: JP8.10 10.8,50 12.75,50 20.55,42.2 56.05,42.2 60.25,38 v1(67.5,38)
PC12: JP8.9 M1.40 | length 62.1
  Top Layer w0.25: v1(67.5,37) 67.55,36.95 M1.40
  Bottom Layer w0.25: JP8.9 12.239,48.421 12.829,48.421 19.5,41.75 55.5,41.75 60.25,37 v1(67.5,37)
PC13: JP8.8 M1.39 | length 65.4
  Top Layer w0.25: v1(67.5,36) 67.65,35.85 M1.39
  Bottom Layer w0.25: JP8.8 9.46,46.458 10.502,47.5 12.5,47.5 18.75,41.25 55.25,41.25 60.5,36 v1(67.5,36)
PD10: JP8.5 M1.28 | length 60.2
  Top Layer w0.25: M1.28 62.85,28.755 63,28.905 v1(63,29)
  Bottom Layer w0.25: JP8.5 12.338,43.58 12.674,43.245 12.755,43.245 16.25,39.75 54.636,39.75 62.75,31.636 62.75,29.321 63,29.071 v1(63,29)
PD12: JP8.4 M1.27 | length 62
  Top Layer w0.25: M1.27 61.777,27.277 v1@61.777,29
  Bottom Layer w0.25: JP8.4 9.54,41.04 10.75,42.25 12.5,42.25 15.5,39.25 54.5,39.25 62,31.75 62,29.321 61.75,29.071 v1(61.75,29)
PD14: JP8.3 M1.24 | length 57.4
  Top Layer w0.25: M1.24 58.55,30.05 v1(59.75,31.25)
  Bottom Layer w0.25: JP8.3 14.29,38.75 54.134,38.75 59.75,33.134 v1(59.75,31.25)
RST1121: M1.5 M2.14 | length 35.2
  Top Layer w0.25: v1(22,47.75) 22.067,47.683 22.067,47.183 22.5,46.75 M2.14 ; v1@51.5,45.75 M1.5
  Bottom Layer w0.25: v1(22,47.75) 24,47.75 25.985,45.765 v1(51.462,45.765)
RXD: M1.25 R9.1 R14.2 | length 38.6
  Top Layer w0.25: R14.2 56.25,24 58.25,26 59.5,26 59.627,26.127 M1.25@59.627,27.25 ; M1.25 59.5,27.4 59.5,29 62.5,32 v1(66.25,32) ; v1(76,48) R9.1
  Bottom Layer w0.25: v1(66.25,32) 66.317,32.067 66.317,32.567 74,40.25 74,47.5 74.5,48 v1(76,48)
SCK: M1.16 M2.5 | length 22.3
  Top Layer w0.25: M2.5 43.268,46.75 50.692,39.326 50.692,34.058 51,33.75 53.15,33.75 M1.16
SWCLK: JP7.2 M1.10 | length 26
  Top Layer w0.25: M1.10 53.282,40.218 54.282,40.218 55.377,39.123 55.377,35.023 v1(55.4,35)
  Bottom Layer w0.25: v1(55.4,35) 56.995,33.405 56.995,23.273 57.552,22.716 57.552,21.198 57.93,20.82 60.27,20.82 JP7.2
SWDIO: JP7.3 M1.9 | length 22.7
  Top Layer w0.25: M1.9 54.9,41.35 56.2,40.05 56.2,35.084 v1(56.242,35.042)
  Bottom Layer w0.25: v1(56.242,35.042) 56.242,34.947 56.413,34.776 56.413,34.7 57.75,33.363 57.75,23.16 JP7.3
TXD: M1.26 R10.1 R13.2 | length 47.5
  Top Layer w0.25: R13.2 52.75,22.5 52.5,22.25 52.5,21.25 53,20.75 54.75,20.75 55,21 55,21.498 55.012,21.51 55.012,22.488 55,22.5 55,22.698 55.5,23.198 59.448,23.198 60.25,24 60.25,25.5 60.418,25.668 60.418,25.68 60.75,26.012 M1.26 60.75,29.5 62.5,31.25 v1(67.25,31.25) ; v1(74.75,47.25) R10.1
  Bottom Layer w0.25: v1(67.25,31.25) 67.25,32.75 74.75,40.25 v1(74.75,47.25)
UP: M1.38 S1.2 | length 112.9
  Top Layer w0.25: M1.38 v1(70.5,34.75)
  Bottom Layer w0.25: S1.2 2.675,47.675 2.675,48.629 2.821,48.775 5.975,48.775 7,47.75 7,35.5 3.25,31.75 3.25,24.5 8,19.75 64.5,19.75 69,24.25 69,33.5 70.183,34.683 70.433,34.683 v1(70.5,34.75)
V_IN: C1.2 C2.2 C3.1 C4.1 D2.3 U2.1 U2.3 U3.1 | length 68.9
  Top Layer w0.25: C2.2 C2.2@42.425,32.5 ; 44,32.5 44.05,32.55 ; C1.2@73.675,37.5 C1.2 ; U2.1@75.775,37.575 U2.1 ; C3.1@75.8,36.225 C3.1 78.225,36.175 D2.3 78.25,37 78.073,37.177 77.873,37.177 77.7,37.35 U2.3
  Top Layer w0.6: C2.2@42.425,32.5 44,32.5 ; C4.1 44.1,31.575 44.693,31.575 45.5,30.768 v1(45.5,30.75) ; C4.1@44.05,31.675 44.05,32.5 U3.1 ; v1(45.75,21) 48.5,18.25 66.75,18.25 v1(72.25,23.75) ; v1(72.75,37.083) 73.34,37.083 73.675,37.418 C1.2@73.675,37.5 ; C1.2 U2.1@75.775,37.575 ; C3.1@75.8,36.225 U2.1
  Bottom Layer w0.6: v1(45.5,30.75) 45.5,21.25 v1(45.75,21)
  Bottom Layer w1: v1(72.25,23.75) 72.75,24.25 v1(72.75,37.083)
VBAT: BT1.1 D2.1 JP2.1 R5.1 U1.3 | length 31.3
  Top Layer w0.25: 79.645,25.355 79.855,25.355 79.875,25.375 ; JP2.1 JP2.1@81.418,22.082 ; BT1.1@81.418,10.332 BT1.1
  Top Layer w0.6: R5.1 78.75,27.5 ; 77.3,32.45 D2.1 ; 82.2,25.95 U1.3
  Top Layer w1: 77.3,32.45 78.75,31 78.75,27.5 78.75,26.25 79.645,25.355 ; 79.875,25.375 80.75,25.375 ; JP2.1 80.75,25.375 ; BT1.1@81.418,10.332 JP2.1@81.418,22.082 ; 82.2,25.95 81.625,25.375 80.75,25.375
VBUS: C14.2 D2.2 JP1.A4 JP1.A9 JP1.B4 JP1.B9 R1.1 U1.4 U4.7 U4.8 | length 36.2
  Top Layer w0.25: D2.2 D2.2@79.25,33.75 ; 81.15,37.4 JP1.A4 82.525,37.425 83.175,37.425 83.453,37.703 82.503,37.703 JP1.B9 ; U4.7 82.601,49.25 82.75,49.399 ; JP1.B4 82.75,42.55 83.342,42.55 83.664,42.228 ; JP1.A9 82.525,42.575 JP1.A9@82.75,42.575 ; U4.8 82.75,49.399 ; 83.639,42.203 83.775,42.067 84.933,42.067 84.765,42.235 83.671,42.235 ; C14.2 v1(83.5,49.5) 82.851,49.5 82.75,49.399 ; v1@85,42.156 v1(85,42.25)
  Top Layer w0.4: 83.453,37.703 83.7,37.95
  Top Layer w0.6: D2.2 79.2,35.45 81.15,37.4 ; D2.2@79.25,33.75 81.75,33.75 82.25,33.25 R1.1 82.25,30.2 82.2,30.15 U1.4 ; 83.7,37.95 84.849,37.95 85.2,38.301 85.2,41.956 v1@85,42.156
  Bottom Layer w0.6: v1(83.5,49.5) 85,48 v1(85,42.25)
VCC: BZ1.1 C7.1 C9.2 C11.1 C12.1 JP7.7 M1.31 M3.2 R12.1 U2.5 | length 110.2
  Top Layer w0.6: BZ1.1@7.75,32.55 10.8,29.5 19.5,29.5 ; M3.2 22.46,32.46 19.5,29.5 ; R12.1 C11.1 ; M1.31 66.15,25.075 C11.1 ; v1(71.5,29) 71.5,24.5 69.25,22.25 66.075,22.25 ; v1(71.5,32.5) 71.5,38.5 72.491,39.491 73.566,39.491 C9.2 74.025,39.95 U2.5 75.8,41.475 C7.1 ; 19.5,29.5 19.5,22.75 20.25,22 JP7.7 48.75,20.75 50,19.5 65,19.5 66.075,20.575 66.075,22.25 ; 66.075,22.25 C12.1 C11.1
  Bottom Layer w0.6: M3.2 M3.2@22.48,34.98 ; v1(71.5,29) v1(71.5,32.5)
VCC2: C8.1 C10.2 JP8.1 M2.1 U3.5 | length 35
  Top Layer w0.25: U3.5@43.925,37.075 U3.5
  Top Layer w0.6: JP8.1 13.25,37.25 35.75,37.25 37.25,38.75 42.175,38.75 C8.1 C10.2 U3.5@43.925,37.075
pads on no net: JP1.1 JP1.A5 JP1.A8 JP1.B5 JP1.B8 JP1.MH M1.4 M2.13 M2.16 M2.17 S1.3 S2.3 S3.3 U4.1 U4.2 U4.10 U4.11 U4.12 U4.13 U4.14 U4.15 U4.16 U4.17 U4.18 U4.19 U4.20 U4.21 U4.22 U4.23 U4.24 U4.27 U4.28

## Polygon pours and split planes (outlines as drawn)
GND on Bottom Layer "GND_L02_P000" (solid, remove dead copper, pour order 0): 0,16 0,62 90,62 90,16
GND on Bottom Layer "GND_L02_P003" (solid, remove dead copper, pour order 3): -0.25,16.25 -0.25,0 0,-0.25 12.75,-0.25 12.75,16.25
GND on Bottom Layer "GND_L02_P002" (solid, remove dead copper, pour order 2): 83.5,16 83.5,0 90.25,0 90,0.25 90,16
GND on Top Layer "GND_L01_P001" (solid, remove dead copper, pour order 1): 0,16 0,61.75 0.25,62 90,62 90,16
GND on Top Layer "GND_L01_P006" (solid, remove dead copper, pour order 6): 83.5,16 83.5,0 90,0 90,16
GND on Top Layer "GND_L01_P005" (solid, remove dead copper, pour order 5): 0,16 0,0 12.75,0 12.75,16

## Keep-outs
Keep-Out Layer:
  lines w0.2: 0,0 90,0 90,61.931 0,61.931 0,0

## Other copper
Top Layer:
  pour cut-out: 37.75,51.5 37.75,41.75 41.25,41.75 41.25,51.5
  pour cut-out: 22.75,49.5 22.75,40 26.25,40 26.25,49.5
Bottom Layer:
  pour cut-out: 8.25,60.25 8.25,40 13.25,40 13.25,60.25
  pour cut-out: 58,47.25 58,36.25 57.75,36 67.75,36 67.75,47.25

## Silkscreen, mask and mechanical layers (free items; w line width, h text height)
Top Overlay:
  text "C3" at 13.7,58.7 h1
  text "HB" at 50.2,58.7 h1.2
  text "C2" at 7.8,58.2 h1 r90
  text "MB" at 25.2,58.2 h1.2
  text "LB" at 75.2,58.2 h1.2
  text "C0" at 13.7,55.95 h1
  text "C4" at 7.8,55.45 h1 r90
  text "C1" at 7.8,53.2 h1 r90
  text "C5" at 13.7,53.2 h1
  text "C8" at 7.8,50.95 h1 r90
  text "C9" at 13.7,50.7 h1
  text "UP" at 5.8,49.2 h1 r90
  text "C12" at 13.7,48.2 h1
  text "C10" at 7.8,47.95 h1 r90
  text "A12" at 13.7,45.7 h1
  text "C13" at 7.8,44.95 h1 r90
  text "D10" at 13.7,43.2 h1
  text "A13" at 7.8,41.7 h1 r90
  text "D14" at 13.7,40.45 h1
  text "D12" at 7.8,38.45 h1 r90
  text "DOWN" at 5.55,38.2 h1 r90
  text "+3.3V" at 13.7,37.95 h1
  text "GND" at 7.95,35.7 h1
  text "GND" at 20.3,29.95 h1.2 r90
  text "VCC" at 23.05,29.95 h1.2 r90
  text "SCK" at 25.55,29.95 h1.2 r90
  text "DAT" at 28.3,29.95 h1.2 r90
  text "RST" at 30.8,29.95 h1.2 r90
  text "DC" at 33.55,29.95 h1.2 r90
  text "CS" at 36.05,29.95 h1.2 r90
  text "+" at 83.05,20.217 h5
  text "LR_EVM v3.02" at 72.25,18.749 h2.5
  text "VCC" at 49.3,16.95 h1.2 r90
  text "TXD" at 51.8,16.95 h1.2 r90
  text "TXD" at 54.55,16.95 h1.2 r90
  text "GND" at 57.05,16.95 h1.2 r90
  text "DIO" at 59.55,16.95 h1.2 r90
  text "CLK" at 62.05,16.95 h1.2 r90
  text "RST" at 64.8,16.95 h1.2 r90
  text "(c) GBL 2024" at 74.75,16.751 h2
  text "OK" at 5.55,13.95 h1.2 r90
  text "+" at 84.8,8.217 h5
Bottom Overlay:
  text "+" at 83.05,20.217 h5
  text "+" at 84.8,8.217 h5

## Dimensions
0,0 to 3.5,62 on Mechanical 1
0,0 to 90,0 on Mechanical 1

## Text inside footprints (layer, text, board x,y; h text height)
BZ1: Top Overlay "+" at 10.85,32.8 h2 r90; Mechanical 7 "BUZZER" at 5.25,30.25 h0.9 r270; Mechanical 7 "+" at 8.225,34.225 h0.9 r90
D1: Top Overlay "+" at 84.5,33 h1.5 r270